# EAGLE board hexecontahedron (EAGLE 7.7.0)
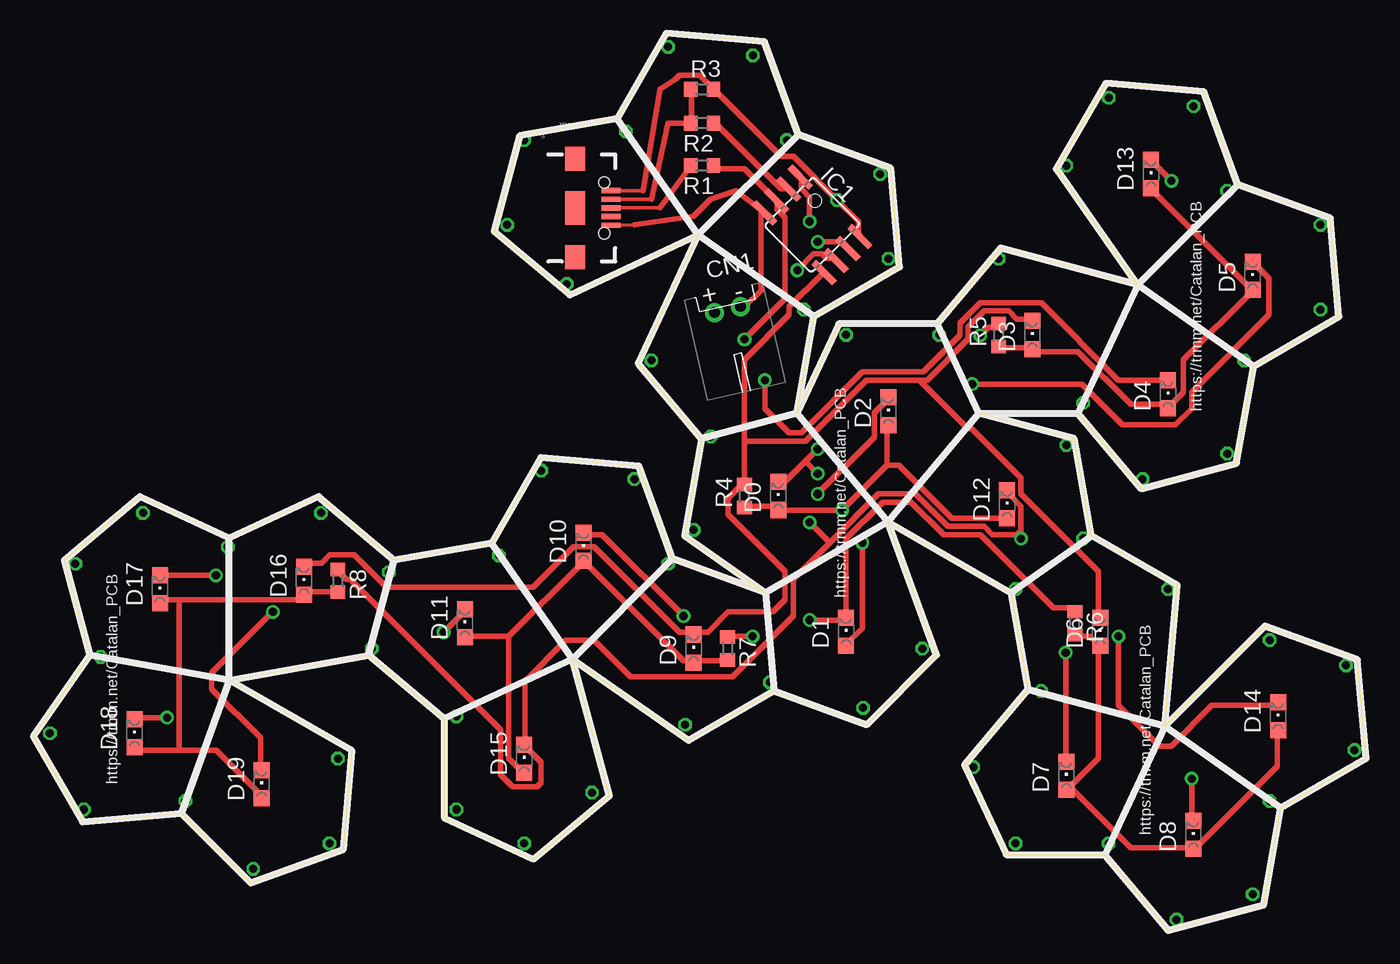
[diagram p0: board, top side]
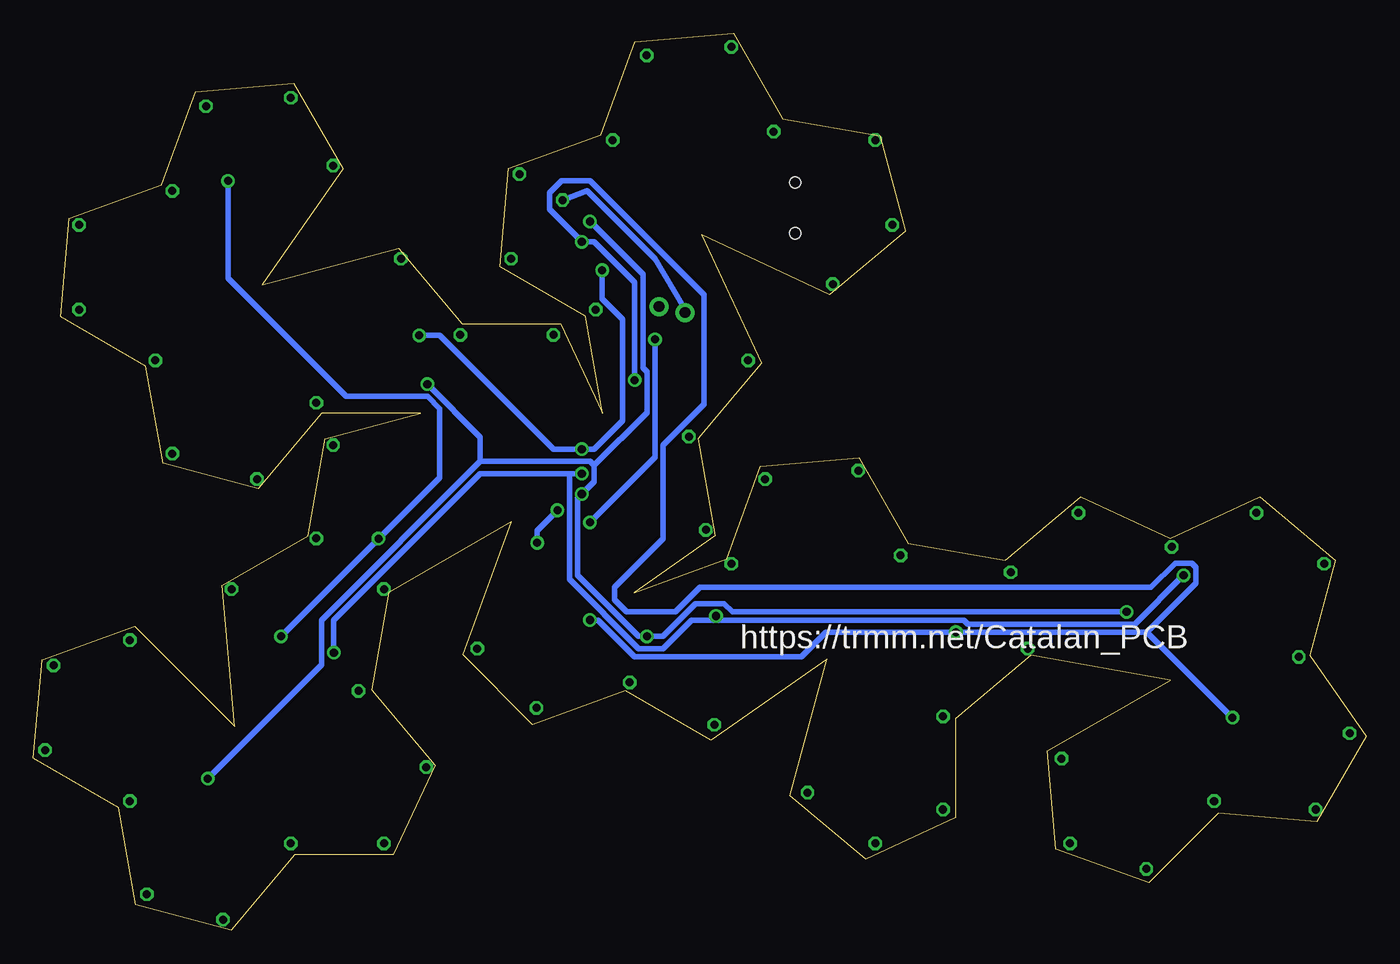
[diagram p1: board, bottom side, seen from below]

Size 99.92 x 67.22 mm. Coordinates in mm from the lower left corner, seen from the top.
Outline: 34.55,52.38 40.22,47.63 49.84,52.11 45.35,42.5 50.11,36.83 48.82,29.55 54.88,25.31 47.93,27.83 45.41,34.78 38.04,35.43 34.34,29.02 27.06,27.74 21.39,32.49 14.69,29.37 7.99,32.49 2.33,27.74 4.24,20.59 0,14.53 3.7,8.13 11.06,8.78 16.29,3.55 23.24,6.08 23.89,13.45 14.7,18.75 25.14,20.6 30.81,15.84 30.8,8.45 37.51,5.32 43.18,10.08 40.43,20.33 49.12,14.24 55.52,17.94 62.48,15.42 67.71,20.65 64.08,30.62 73.27,25.31 74.56,18.03 69.81,12.37 72.94,5.67 80.33,5.67 85.09,0 92.23,1.91 93.51,9.2 99.92,12.89 99.27,20.26 92.32,22.79 84.82,15.29 85.74,25.86 79.33,29.56 78.04,36.84 70.9,38.76 78.3,38.76 83.05,33.09 90.19,35.01 91.48,42.29 97.88,45.99 97.24,53.36 90.29,55.88 87.76,62.83 80.39,63.47 76.69,57.07 82.78,48.38 72.53,51.13 67.78,45.46 60.38,45.45 57.25,38.75 58.53,46.03 64.94,49.72 64.29,57.09 57.34,59.62 54.81,66.57 47.44,67.22 43.75,60.81 36.46,59.53 34.55,52.38
Copper layers (1*16): Top 0.035mm / dielectric 1.5mm / Bottom 0.035mm
Design rules "default": minimum track width 10mil, minimum drill 24mil, track to track 8mil, track to pad 8mil, pad to pad 8mil, via to via 8mil, smd to smd 8mil, copper to edge 40mil, drill to drill 8mil, minimum pad ring 10mil, minimum via ring 8mil, stop-mask expansion 4mil, vias tented up to drill 0mil, thermal gap 10mil
Net classes: 0 default: width 0.406 mm

## Footprints (pad centres in the part's own frame; a part is rotated, then mirrored left to right if it is on the bottom)
JST-PH-2-THM-RA = drill 0.8 pad 1.422: 1 1,0; 2 -1,0
CHIPLED_0805 = smd 1.2 x 1.2: A 0,-1.05; C 0,1.05
SOIC8 = smd 0.5 x 2.2: 1 -1.905,-3.154; 2 -0.645,-3.154; 3 0.625,-3.154; 4 1.895,-3.154; 5 1.905,3.154; 6 0.635,3.154; 7 -0.635,3.154; 8 -1.905,3.154
USB-B-MICRO-SMD_V03 = smd 1.4 x 0.4: D+1 2.7,0; D-1 2.7,0.65; GND1 2.7,-1.3; ID1 2.7,-0.65; VBUS1 2.7,1.3 | smd 1.5 x 1.8: SHIELD1 0,3.7; SHIELD2 0,-3.7 | smd 1.5 x 2.5: SHIELD3 0,0 | hole 0.85: 2.2,1.9; 2.2,-1.9
R0603 = smd 1 x 1.1: 1 -0.85,0; 2 0.85,0

## Placement (x,y rotation side)
CN1  [JST-PH-2-THM-RA]  52.04,46.52 193 top
D0  [CHIPLED_0805]  55.85,32.55 0 top
D1  [CHIPLED_0805]  60.93,22.39 0 top
D2  [CHIPLED_0805]  64.11,38.9 0 top
D3  [CHIPLED_0805]  74.9,44.61 0 top
D4  [CHIPLED_0805]  85.06,40.17 0 top
D5  [CHIPLED_0805]  91.41,49.06 0 top
D6  [CHIPLED_0805]  79.98,22.39 0 top
D7  [CHIPLED_0805]  77.44,11.59 0 top
D8  [CHIPLED_0805]  86.97,7.15 0 top
D9  [CHIPLED_0805]  49.5,21.12 0 top
D10  [CHIPLED_0805]  41.25,28.74 0 top
D11  [CHIPLED_0805]  32.36,23.02 0 top
D12  [CHIPLED_0805]  73,31.91 0 top
D13  [CHIPLED_0805]  83.79,56.68 0 top
D14  [CHIPLED_0805]  93.32,16.04 0 top
D15  [CHIPLED_0805]  36.8,12.86 0 top
D16  [CHIPLED_0805]  20.29,26.2 0 top
D17  [CHIPLED_0805]  9.5,25.56 0 top
D18  [CHIPLED_0805]  7.59,14.77 0 top
D19  [CHIPLED_0805]  17.12,10.96 0 top
IC1  TINY22S  [SOIC8]  58.39,52.87 225 top
JP1  USB_MICROB_PLUGCONN-11752  [USB-B-MICRO-SMD_V03]  40.61,54.14 0 top
R1  68  [R0603]  50.14,57.31 180 top
R2  68  [R0603]  50.14,60.49 180 top
R3  1.0k  [R0603]  50.14,63.03 0 top
R4  [R0603]  53.31,32.55 90 top
R5  [R0603]  72.36,44.61 90 top
R6  [R0603]  78.08,23.02 270 top
R7  [R0603]  52.04,21.12 270 top
R8  [R0603]  22.83,26.2 270 top

## Library data of the parts
CN1 = adafruit
D0 D1-D19 = led
IC1 = atmel; OC_FARNELL: unknown; OC_NEWARK: unknown
JP1 = SparkFun-Connectors; PROD_ID: CONN-11752
R1-R8 = resistor

## Nets
B0: D3.C D6.C D9.C D16.C IC1.5 R4.2
B1: D0.C D7.C D10.C D17.C IC1.6 R5.2
B2: D1.C D4.C D11.C D18.C IC1.7 R6.1
B3: D2.C D5.C D8.C D19.C IC1.1 R7.1
B4: D12.C D13.C D14.C D15.C IC1.3 R1.1 R8.1
GND: CN1.2 IC1.4 JP1.GND1
N$1: JP1.D+1 R1.2
N$2: JP1.D-1 R2.2 R3.1
N$4: IC1.2 R2.1
VBUS: CN1.1 IC1.8 JP1.VBUS1 R3.2
Y0: D0.A D1.A D2.A D12.A R4.1
Y1: D3.A D4.A D5.A D13.A R5.1
Y2: D6.A D7.A D8.A D14.A R6.2
Y3: D9.A D10.A D11.A D15.A R7.2
Y4: D16.A D17.A D18.A D19.A R8.2

## Tracks (layer width: path | path; a pad name or v marks a point on that pad's centre or on a via)
B0
  Top 0.406: 53.31,36.66 53.31,42.76 56.66,46.11 56.66,46.72 59.1,49.16 IC1.5 | 53.31,36.66 53.31,33.61 | 53.31,33.61 52.09,32.4 52.09,31.18 56.36,26.91 56.36,24.78 55.45,23.86 52.09,23.86 50.57,22.34 49.65,22.34 D9.C 49.35,22.34 48.43,22.34 42.03,28.74 40.51,28.74 37.46,25.69 26.49,25.69 24.05,28.13 22.22,28.13 21.61,27.52 20.39,27.52 D16.C | 53.31,33.61 R4.2 | 66.42,41.23 62.46,41.23 57.88,36.66 53.31,36.66 | 66.42,41.23 67.03,41.23 70.08,44.28 70.08,45.2 71.29,46.42 73.12,46.42 73.73,45.81 74.65,45.81 D3.C | 66.42,41.23 70.08,37.58 70.38,37.58 74.04,33.92 74.04,32.7 79.83,26.91 79.83,23.56 D6.C
B1  (via drill 0.61)
  Top 0.406: v70.99,44.59 71.6,45.2 72.21,45.2 R5.2 | 57.88,35.14 56.05,33.31 D0.C | 57.88,35.14 v58.8,36.05 | v77.39,20.81 77.39,12.89 D7.C | 57.88,35.14 v58.8,34.22 | v13.69,26.6 9.73,26.6 D17.C | v48.74,23.56 42.64,29.65 41.42,29.65 D10.C | v57.27,49.46 58.49,50.68 59.1,50.68 59.41,50.38 60.02,50.38 IC1.6
  Bottom 0.406: v70.99,44.59 69.47,44.59 60.93,36.05 v58.8,36.05 57.88,36.05 55.75,38.19 55.75,45.81 57.27,47.33 v57.27,49.46 | v77.39,20.81 77.39,23.25 66.42,34.22 59.71,34.22 | v58.8,34.22 59.71,34.22 | v13.69,26.6 17.35,22.95 29.84,22.95 30.15,23.25 48.74,23.25 | 48.74,23.25 50.57,23.25 52.7,21.12 54.53,21.12 59.71,26.3 59.71,34.22 | 48.74,23.25 v48.74,23.56
B2  (via drill 0.61)
  Top 0.406: R6.1 78,24.17 76.48,24.17 70.99,29.65 68.25,29.65 65.81,32.09 63.67,32.09 60.93,29.35 D1.C 60.93,23.25 v58.19,23.25 | v54.84,41.23 54.84,39.1 56.66,37.27 57.58,37.27 62.15,41.84 66.72,41.84 69.47,44.59 69.47,45.5 70.99,47.03 75.56,47.03 81.35,41.23 85.01,41.23 D4.C | v58.8,51.6 60.63,51.6 60.93,51.29 IC1.7 | v10.03,15.94 7.59,15.94 D18.C | v30.76,22.34 32.28,23.86 D11.C
  Bottom 0.406: v54.84,41.23 54.84,48.55 57.88,51.6 v58.8,51.6 61.24,54.04 61.24,55.26 60.32,56.17 58.19,56.17 49.65,47.64 49.65,39.41 52.7,36.36 52.7,29.35 56.36,25.69 56.36,24.78 55.45,23.86 51.79,23.86 49.96,25.69 16.13,25.69 14.3,27.52 13.08,27.52 12.77,27.21 12.77,25.99 16.43,22.34 | 16.43,22.34 v10.03,15.94 | 16.43,22.34 v30.76,22.34 40.51,22.34 42.34,20.51 54.84,20.51 57.58,23.25 v58.19,23.25
B3  (via drill 0.61)
  Top 0.406: v53.92,22.03 52.09,22.03 R7.1 | v58.8,32.7 63.07,36.97 63.07,38.8 63.98,39.71 D2.C | v86.84,11.36 86.84,8.32 D8.C | v17.95,23.86 13.38,19.29 13.38,18.07 17.04,14.41 17.04,12.28 D19.C | v70.38,40.93 78.61,40.93 81.66,37.88 85.62,37.88 86.84,39.1 86.84,40.32 92.63,46.11 92.63,48.85 91.41,50.07 D5.C | v58.19,53.12 58.19,54.95 57.58,55.56 57.58,56.17 IC1.1
  Bottom 0.406: v86.84,11.36 78.31,19.9 78.31,23.25 66.42,35.14 | 66.42,35.14 58.19,35.14 57.88,34.83 | 57.88,34.83 57.88,33.61 v58.8,32.7 59.1,32.4 59.1,26.6 54.53,22.03 v53.92,22.03 52.7,22.03 50.26,24.47 48.13,24.47 47.52,23.86 v17.95,23.86 | v70.38,40.93 66.42,36.97 66.42,35.14 | v58.19,53.12 54.23,49.16 54.23,42.15 53.92,41.84 53.92,38.8 57.88,34.83
B4  (via drill 0.61)
  Top 0.406: R1.1 51.18,57.08 53.31,57.08 55.45,54.95 IC1.3 55.75,54.65 55.75,54.04 56.36,53.43 56.36,47.33 v53.31,44.28 | R8.1 22.83,26.91 23.44,26.3 23.75,26.3 35.02,15.02 35.02,11.67 35.94,10.75 37.77,10.75 38.07,11.06 38.07,12.58 36.85,13.8 D15.C 36.85,14.11 36.85,18.68 39.9,21.73 42.03,21.73 44.78,18.98 52.4,18.98 56.97,23.56 56.97,26.3 59.71,29.04 | 73.73,29.65 74.04,29.96 74.04,31.79 73.12,32.7 D12.C | 73.73,29.65 71.9,29.65 71.29,30.26 68.55,30.26 66.11,32.7 63.37,32.7 59.71,29.04 | v81.35,22.03 81.35,16.85 84.4,13.8 85.32,13.8 88.36,16.85 93.24,16.85 D14.C | 73.73,29.65 v74.04,29.35 | v85.32,56.17 83.79,57.69 D13.C | 59.71,29.04 v58.19,30.57
  Bottom 0.406: v81.35,22.03 v74.04,29.35 69.47,33.92 69.47,39.1 70.38,40.02 76.48,40.02 85.32,48.85 v85.32,56.17 | v53.31,44.28 53.31,35.44 v58.19,30.57
GND
  Top 0.254: JP1.GND1 45.06,52.87
  Top 0.406: CN1.2 53.31,46.72 54.53,47.94 54.53,53.73 IC1.4 52.68,55.41 50.77,54.77 49.5,53.5 45.06,52.87
N$1
  Top 0.254: JP1.D+1 46.96,54.14
  Top 0.406: 46.96,54.14 R1.2
N$2
  Top 0.254: JP1.D-1 46.33,54.77
  Top 0.406: R3.1 49.35,62.88 49.35,60.74 R2.2 47.6,60.49 46.33,54.77
N$3  (via drill 0.6)
  other vias: 46.33,42.71
N$4
  Top 0.406: R2.1 51.18,60.44 56.05,55.56 56.36,55.56 IC1.2
N$5  (via drill 0.6)
  other vias: 49.5,30.01
N$6  (via drill 0.6)
  other vias: 50.77,36.99
N$7  (via drill 0.6)
  other vias: 45.06,33.82
N$8  (via drill 0.6)
  other vias: 47.6,27.47
N$9  (via drill 0.6)
  other vias: 38.07,34.45
N$10  (via drill 0.6)
  other vias: 34.9,28.1
N$11  (via drill 0.6)
  other vias: 26.64,26.83
N$12  (via drill 0.6)
  other vias: 21.56,31.28
N$13  (via drill 0.6)
  other vias: 14.58,28.74
N$14  (via drill 0.6)
  other vias: 8.23,31.28
N$15  (via drill 0.6)
  other vias: 3.15,27.47
N$16  (via drill 0.6)
  other vias: 5.05,20.48
N$17  (via drill 0.6)
  other vias: 1.24,14.77
N$18  (via drill 0.6)
  other vias: 3.78,9.05
N$19  (via drill 0.6)
  other vias: 11.4,9.69
N$20  (via drill 0.6)
  other vias: 16.48,4.61
N$21  (via drill 0.6)
  other vias: 22.2,6.51
N$22  (via drill 0.6)
  other vias: 22.83,12.86
N$23  (via drill 0.6)
  other vias: 25.37,21.12
N$24  (via drill 0.6)
  other vias: 31.72,16.04
N$25  (via drill 0.6)
  other vias: 31.72,9.05
N$26  (via drill 0.6)
  other vias: 36.8,6.51
N$27  (via drill 0.6)
  other vias: 41.88,10.32
N$28  (via drill 0.6)
  other vias: 48.87,15.4
N$29  (via drill 0.6)
  other vias: 55.22,18.58
N$30  (via drill 0.6)
  other vias: 62.2,16.67
N$31  (via drill 0.6)
  other vias: 66.65,21.12
N$32  (via drill 0.6)
  other vias: 73.63,25.56
N$33  (via drill 0.6)
  other vias: 75.54,17.94
N$34  (via drill 0.6)
  other vias: 70.46,12.23
N$35  (via drill 0.6)
  other vias: 73.63,6.51
N$36  (via drill 0.6)
  other vias: 80.62,6.51
N$37  (via drill 0.6)
  other vias: 85.7,0.8
N$38  (via drill 0.6)
  other vias: 91.41,2.7
N$39  (via drill 0.6)
  other vias: 92.68,9.69
N$40  (via drill 0.6)
  other vias: 99.03,13.5
N$41  (via drill 0.6)
  other vias: 98.4,19.85
N$42  (via drill 0.6)
  other vias: 92.68,21.75
N$43  (via drill 0.6)
  other vias: 85.06,25.56
N$44  (via drill 0.6)
  other vias: 78.71,29.37
N$45  (via drill 0.6)
  other vias: 77.44,36.36
N$46  (via drill 0.6)
  other vias: 78.71,39.53
N$47  (via drill 0.6)
  other vias: 83.16,33.82
N$48  (via drill 0.6)
  other vias: 89.51,35.72
N$49  (via drill 0.6)
  other vias: 90.78,42.71
N$50  (via drill 0.6)
  other vias: 96.49,46.52
N$51  (via drill 0.6)
  other vias: 96.49,52.87
N$52  (via drill 0.6)
  other vias: 89.51,55.41
N$53  (via drill 0.6)
  other vias: 86.97,61.76
N$54  (via drill 0.6)
  other vias: 80.62,62.39
N$55  (via drill 0.6)
  other vias: 77.44,57.31
N$56  (via drill 0.6)
  other vias: 72.36,50.33
N$57  (via drill 0.6)
  other vias: 67.92,44.61
N$58  (via drill 0.6)
  other vias: 60.93,44.61
N$59  (via drill 0.6)
  other vias: 57.76,46.52
N$60  (via drill 0.6)
  other vias: 64.11,50.33
N$61  (via drill 0.6)
  other vias: 63.47,56.68
N$62  (via drill 0.6)
  other vias: 56.49,59.22
N$63  (via drill 0.6)
  other vias: 53.95,65.57
N$64  (via drill 0.6)
  other vias: 47.6,66.2
N$65  (via drill 0.6)
  other vias: 44.42,59.85
N$66  (via drill 0.6)
  other vias: 36.8,59.22
N$67  (via drill 0.6)
  other vias: 35.53,52.87
N$68  (via drill 0.6)
  other vias: 39.98,48.42
VBUS  (via drill 0.6)
  Top 0.254: JP1.VBUS1 45.69,55.41
  Top 0.406: IC1.8 61.85,52.21 61.85,53.12 v60.25,54.72 56.97,58 56.05,58 51.18,62.88 R3.2 50.87,63.18 49.96,64.09 48.43,64.09 48.13,63.79 46.96,63.03 45.69,55.41
  Bottom 0.406: v60.25,54.72 58.39,55.41 53.31,50.33 51.18,46.72 CN1.1
Y0  (via drill 0.61)
  Top 0.406: R4.1 53.31,31.79 55.75,31.79 D0.A 56.05,31.48 v60.63,31.48 63.98,34.83 | v62.15,29.04 62.15,22.64 60.93,21.42 D1.A | 63.98,34.83 63.98,37.58 D2.A | 63.98,34.83 64.89,34.83 68.86,30.87 72.82,30.87 D12.A
  Bottom 0.406: v62.15,29.04 62.15,29.96 v60.63,31.48
Y1
  Top 0.406: R5.1 72.51,43.67 74.65,43.67 D3.A 74.95,43.37 78.31,43.37 82.27,39.41 85.01,39.41 D4.A 85.32,39.41 86.23,40.32 86.23,42.76 91.41,47.94 | 91.41,47.94 83.79,55.56 D13.A | 91.41,47.94 D5.A
Y2
  Top 0.406: R6.2 78.31,22.03 79.22,22.03 79.83,21.42 D6.A 79.83,21.12 79.83,12.89 77.7,10.75 | 77.7,10.75 82.27,6.18 86.84,6.18 D8.A 87.14,6.18 93.24,12.28 93.24,14.72 D14.A | 77.7,10.75 D7.A
Y3
  Top 0.406: R7.2 51.79,20.2 49.65,20.2 D9.A 49.35,20.2 48.74,20.2 41.42,27.52 D10.A 41.12,27.52 35.63,22.03 | 35.63,22.03 32.59,22.03 D11.A | 35.63,22.03 35.63,12.89 36.55,11.97 D15.A
Y4
  Top 0.406: 10.94,13.5 13.69,13.5 17.04,10.14 D19.A | 10.94,13.5 7.59,13.5 D18.A | R8.2 22.83,25.38 20.39,25.38 D16.A 20.09,25.08 19.78,24.78 10.94,24.78 | 10.94,24.78 9.73,24.78 D17.A | 10.94,24.78 10.94,13.5

## Text on the board
tPlace: https://trmm.net/Catalan_PCB | https://trmm.net/Catalan_PCB | https://trmm.net/Catalan_PCB | https://trmm.net/Catalan_PCB
bPlace: https://trmm.net/Catalan_PCB